# Altium PCB Flash烧录器STM32版.pcbdoc
Units mm, origin at the board's own origin, x right, y up, seen from the top; angles counter-clockwise.
Board outline 84.67 x 59.94 mm, 2 copper layers (Top Layer, Bottom Layer); 29 components, 59 nets, 142 pads, 27 vias.
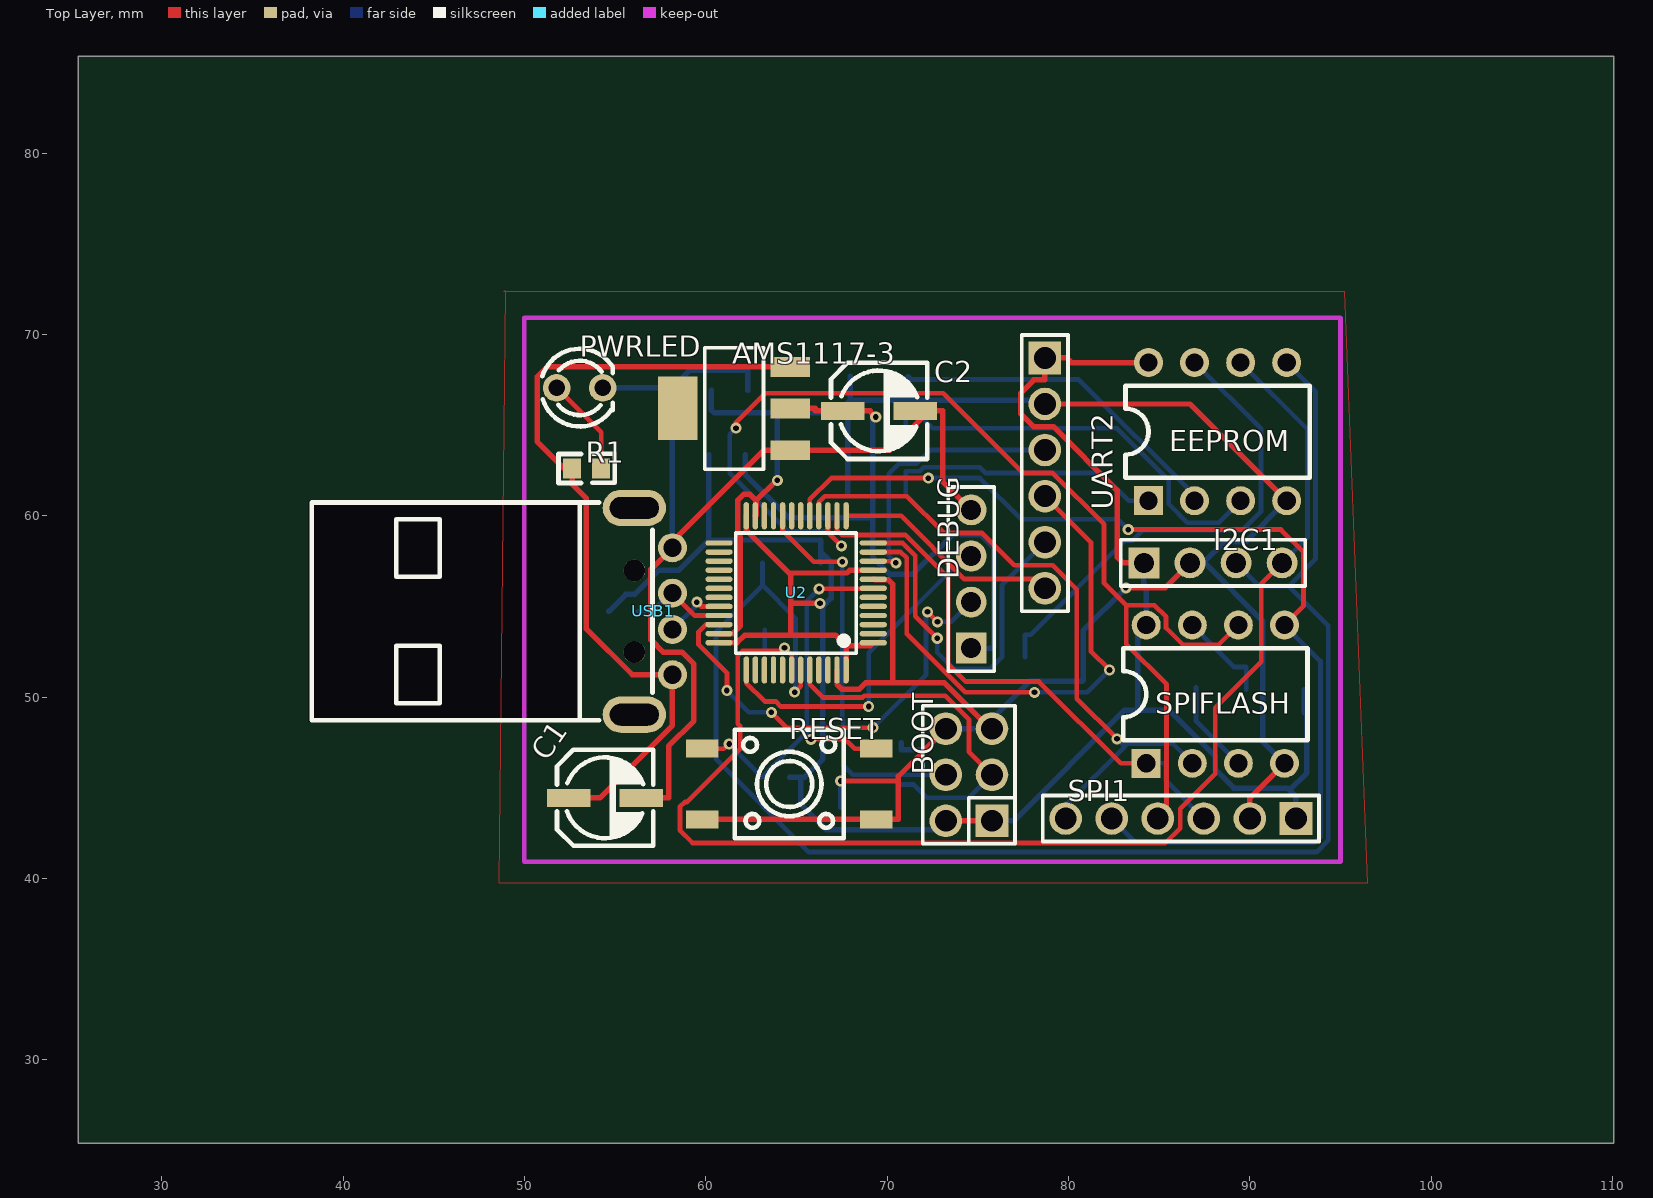
[diagram p0: Top Layer view]
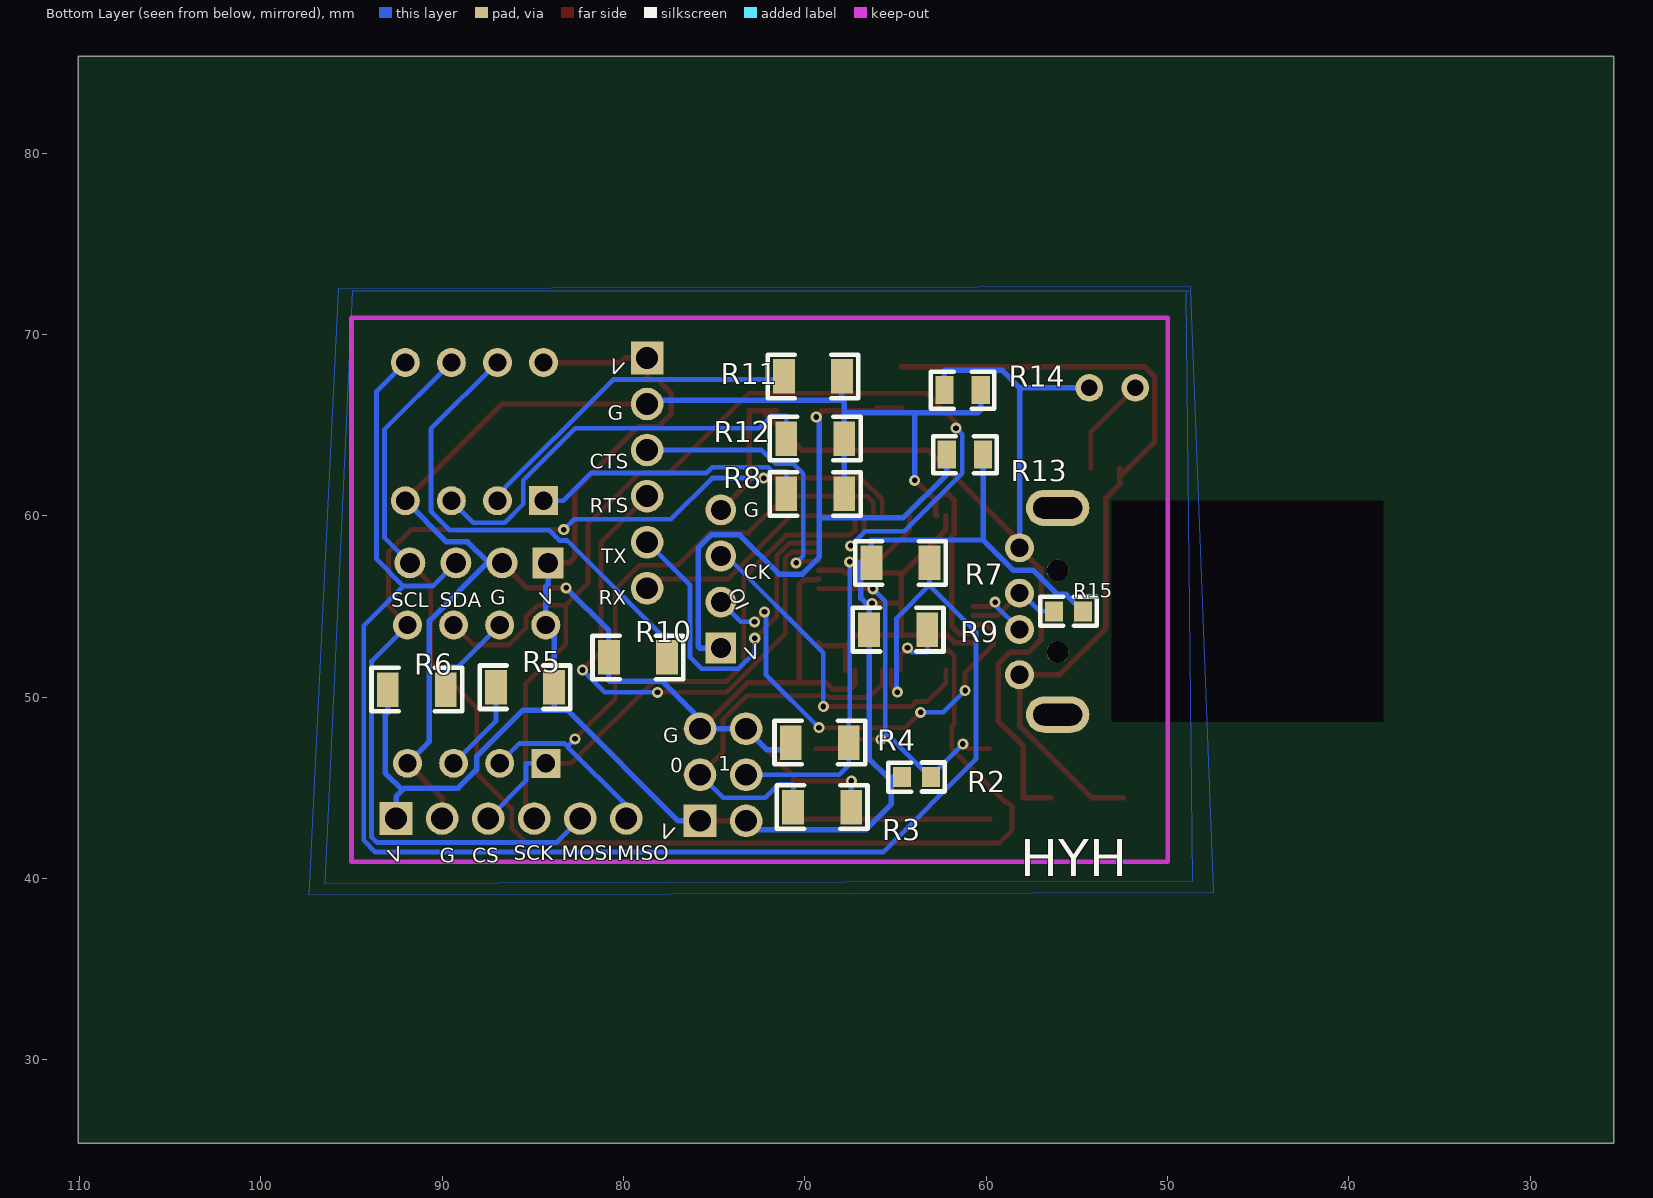
[diagram p1: Bottom Layer view, seen from below]

## Layer stack, top to bottom
Top Layer: signal copper (thickness not stored)
Dielectric: dielectric 0.32, FR-4, Dk 4.8
Bottom Layer: signal copper (thickness not stored)

## Board outline
110.075,25.4 25.4,25.4 25.4,85.344 110.075,85.344

## Components (designator, comment, footprint, x,y, rotation, side; value= is the part's Value field where it differs from the comment)
AMS1117-3 "AMS1117-3.3_C165482" SOT-223_L6.5-W3.5-P2.30-LS7.0-BR 61.561,65.913 r0 top
BOOT "210S-2*3P L=11.6MMGold-plated black" HDR-TH_6P-P2.54-V-R2-C3-S2.54 74.515,45.72 r90 top
C1 "100uF" CAP-SMD_BD5.0-L5.3-W5.3-FD 54.449,44.45 r0 top
C2 "100uF" CAP-SMD_BD5.0-L5.3-W5.3-FD 69.562,65.786 r0 top
DEBUG "MTP125-1104S1" HDR-TH_4P-P2.54-V 74.642,56.515 r90 top
EEPROM "DS1009-08AT1NX-0A2" DIP-8_L10.0-W6.5-P2.54-LS7.6-BL 88.231,64.643 r0 top
I2C1 "MTP125-1104S1" HDR-TH_4P-P2.54-V 87.977,57.404 r0 top
PWRLED "MHL3014SRTS" LED-TH_BD3.0-P2.54-FD 53.052,67.056 r0 top
R1 "1K" R0603#1 53.434,62.611 r0 top
R2 "1K" R0603#2 63.848,45.593 r0 bottom
R3 "10K" R1206 69.054,43.942 r0 bottom
R4 "10K" R1206 69.181,47.498 r0 bottom
R5 "10K" R1206 85.437,50.546 r0 bottom
R6 "10K" R1206 91.406,50.419 r0 bottom
R7 "10K" R1206 64.736,57.404 r0 bottom
R8 "10K" R1206 69.435,61.214 r0 bottom
R9 "10K" R1206 64.863,53.721 r0 bottom
R10 "10K" R1206 79.214,52.197 r0 bottom
R11 "10K" R1206 69.562,67.691 r0 bottom
R12 "10K" R1206 69.435,64.262 r0 bottom
R13 "0" R0805 61.18,63.373 r0 bottom
R14 "0" R0805 61.306,66.929 r0 bottom
R15 "1K" R0603#2 55.465,54.737 r0 bottom
RESET "K2-6639SP-C4SC-04" KEY-SMD_4P-L6.0-W6.0-P3.90-LS10.0 64.609,45.212 r0 top
SPI1 "Header-Male-2.54_1x6" HDR-TH_6P-P2.54-V 86.199,43.307 r180 top
SPIFLASH "DS1009-08AT1NX-0A2" DIP-8_L10.0-W6.5-P2.54-LS7.6-BL 88.104,50.165 r0 top
U2 "STM32F103C8T6" LQFP-48_L7.0-W7.0-P0.50-LS9.0-BL 64.99,55.753 r90 top
UART2 "Header-Male-2.54_1x6" HDR-TH_6P-P2.54-V 78.706,62.357 r270 top
USB1 "USB-05" USB-A-TH_48037-0001 57.116,54.737 r270 top

## Footprints (in the part's own frame and the unit in brackets; to place one, negate y for a bottom-side part, rotate by r counter-clockwise, add the part's x,y. Pads: shape width x height; smd on the part's side, far side on the other; paste and mask are expansions set on the pad)
CAP-SMD_BD5.0-L5.3-W5.3-FD [mm]
  rect 2.4x1 smd: 1(-2,0) 2(2,0)
  silkscreen extent -2.65,-2.65 2.65,2.65
DIP-8_L10.0-W6.5-P2.54-LS7.6-BL [mil]
  rect 63x63 hole 39.37: 1(-150,-150)
  round 63 hole 39.37: 2(-50,-150) 3(50,-150) 4(150,-150) 5(150,150) 6(50,150) 7(-50,150) 8(-150,150)
  silkscreen extent -200,-100 200,100
HDR-TH_4P-P2.54-V [mm]
  rect 1.7x1.7 hole 1.1: 1(-3.81,0)
  round 1.7 hole 1.1: 2(-1.27,0) 3(1.27,0) 4(3.81,0)
  silkscreen extent -5.08,-1.27 5.08,1.27
HDR-TH_6P-P2.54-V [mm]
  rect 1.8x1.8 hole 1.2: 1(-6.35,0)
  round 1.8 hole 1.2: 2(-3.81,0) 3(-1.27,0) 4(1.27,0) 5(3.81,0) 6(6.35,0)
  silkscreen extent -7.62,-1.27 7.62,1.27
HDR-TH_6P-P2.54-V-R2-C3-S2.54 [mm]
  rect 1.8x1.8 hole 1.2: 1(-2.54,-1.27)
  round 1.8 hole 1.2: 2(-2.54,1.27) 3(0,-1.27) 4(0,1.27) 5(2.54,-1.27) 6(2.54,1.27)
  silkscreen extent -3.81,-2.54 3.81,2.54
KEY-SMD_4P-L6.0-W6.0-P3.90-LS10.0 [mm]
  rect 1.8x1 smd: 1(-4.8,1.95) 2(4.8,1.95) 3(-4.8,-1.95) 4(4.8,-1.95)
  silkscreen extent -3,-3 3,3
LED-TH_BD3.0-P2.54-FD [mil]
  round 60 hole 36: 1(-50,0) 2(50,0)
  silkscreen extent -81,-84 72,85
LQFP-48_L7.0-W7.0-P0.50-LS9.0-BL [mm]
  oval 0.3x1.5 smd: 1(-2.75,-4.25) 2(-2.25,-4.25) 3(-1.75,-4.25) 4(-1.25,-4.25) 5(-0.75,-4.25) 6(-0.25,-4.25) 7(0.25,-4.25) 8(0.75,-4.25) 9(1.25,-4.25) 10(1.75,-4.25) 11(2.25,-4.25) 12(2.75,-4.25) 25(2.75,4.25) 26(2.25,4.25) 27(1.75,4.25) 28(1.25,4.25) 29(0.75,4.25) 30(0.25,4.25) 31(-0.25,4.25) 32(-0.75,4.25) 33(-1.25,4.25) 34(-1.75,4.25) 35(-2.25,4.25) 36(-2.75,4.25)
  oval 1.5x0.3 smd: 13(4.25,-2.75) 14(4.25,-2.25) 15(4.25,-1.75) 16(4.25,-1.25) 17(4.25,-0.75) 18(4.25,-0.25) 19(4.25,0.25) 20(4.25,0.75) 21(4.25,1.25) 22(4.25,1.75) 23(4.25,2.25) 24(4.25,2.75) 37(-4.25,2.75) 38(-4.25,2.25) 39(-4.25,1.75) 40(-4.25,1.25) 41(-4.25,0.75) 42(-4.25,0.25) 43(-4.25,-0.25) 44(-4.25,-0.75) 45(-4.25,-1.25) 46(-4.25,-1.75) 47(-4.25,-2.25) 48(-4.25,-2.75)
  silkscreen extent -3.33,-3.31 3.3,3.34
R0603#1 [mm]
  rect 1x1.1 smd: 1(-0.8,0) 2(0.8,0)
  silkscreen extent -1.55,-0.8 1.55,0.81
R0603#2 [mm]
  rect 1x1.1 smd: 1(0.8,0) 2(-0.8,0)
  silkscreen extent -1.55,-0.81 1.55,0.8
R0805 [mm]
  rect 1x1.55 smd: 1(1,0) 2(-1,0)
  silkscreen extent -1.75,-1.02 1.75,1.02
R1206 [mm]
  rect 1.2x1.9 smd: 1(1.6,0) 2(-1.6,0)
  silkscreen extent -2.5,-1.2 2.5,1.2
SOT-223_L6.5-W3.5-P2.30-LS7.0-BR [mil]
  rect 85x43 smd: 1(122,-90.5) 2(122,0.5) 3(122,90.5)
  rect 85x138 smd: 4(-122,0.5)
  silkscreen extent -64,-132 64,132
USB-A-TH_48037-0001 [mm]
  round 1.6 hole 1: 1(3.5,1.05) 2(1,1.05) 3(-1,1.05) 4(-3.5,1.05)
  oval 2x3.5 hole 1.2 slot 2.7 at 90 deg: 5(-5.7,-1.05) 6(5.7,-1.05)
  round 1.2 hole 1.2 unplated: ""(-2.25,-1.05) ""(2.25,-1.05)
  Multi-Layer board cut-out: -6.096,-4.03 6.096,-4.03 6.096,-19.016 -6.096,-19.016
  silkscreen extent -6,-18.85 6,-0.05

## Via types
v1: diameter 0.61, hole 0.31, Top Layer to Bottom Layer, 27 vias

## Nets (pads, with @x,y where several pads share a name; then routed paths per layer and width w, separated by ;. In a path a pad name is that pad's centre, name@x,y a point inside that pad or via, vN(x,y) a via of type N, cw(c..) or ccw(c..) an arc to the next point about the centre after c; other vN are vias at no path point)
+5V: AMS1117-3.3 C1.1 R1.1 USB1.1 | length 45.6
  Top Layer w0.3: C1.1@52.45,44.45 54.17,44.45 58.165,48.445 USB1.1 55.953,51.237 53.423,53.769 53.423,60.963 52.633,61.75 R1.1@52.633,62.182 ; R1.1 R1.1@52.633,62.182 ; AMS1117-3.3 51.249,68.212 50.702,67.666 50.702,64.112 R1.1@52.633,62.182
AMS1117-3_4: AMS1117-3.4
BOOT0: BOOT.3 R3.1 U2.44 | length 21.2
  Top Layer w0.26: U2.44@65.742,51.496 65.742,50.714 66.466,49.987 68.648,49.987 68.742,50.081 73.207,50.081 74.515,48.773 74.515,46.99 BOOT.3
  Bottom Layer w0.26: R3.1@70.654,43.942 70.654,45.184 71.47,45.184 72.204,44.45 74.515,44.45 BOOT.3
BOOT1: BOOT.4 R4.2 U2.20 | length 21.9
  Top Layer w0.26: U2.20@64.241,59.997 64.241,59.182 65.96,57.465 v1(67.535,57.465)
  Bottom Layer w0.26: v1(67.535,57.465) 67.535,48.786 67.581,48.74 R4.2 67.581,46.876 67.581,46.256 68.117,45.72 BOOT.4
DM: U2.32 USB1.2 | length 3.4
  Top Layer w0.26: v1(59.511,55.237) 59.747,55.001 U2.32@60.746,55.001
  Bottom Layer w0.26: USB1.2 59.511,55.082 v1(59.511,55.237)
DP: R15.1 U2.33 USB1.3 | length 5.4
  Top Layer w0.26: USB1.3 59.402,54.503 U2.33@60.746,54.503
  Bottom Layer w0.26: R15.1 57.058,54.737 58.058,55.738 USB1.3
EEPROM_A0: EEPROM.1 R8.1 | length 15.5
  Bottom Layer w0.26: R8.1@71.035,61.214 71.035,62.456 71.807,62.456 72.031,62.68 75.125,62.68 75.45,62.357 81.805,62.357 83.329,60.833 EEPROM.1
EEPROM_A1: EEPROM.2 R11.1 | length 18.8
  Bottom Layer w0.26: R11.1@71.162,67.691 71.337,67.513 80.578,67.513 86.961,61.133 EEPROM.2
EEPROM_A2: EEPROM.3 R12.1 | length 23.4
  Bottom Layer w0.26: R12.1@71.035,64.262 71.035,65.504 71.851,65.504 72.529,64.826 82.668,64.826 85.541,61.953 85.541,60.653 86.567,59.627 88.294,59.627 EEPROM.3
EEPROM_WP: EEPROM.7 R10.2 | length 26.8
  Bottom Layer w0.26: R10.2 77.614,53.439 77.919,53.439 83.123,58.644 83.547,58.644 84.109,59.205 89.585,59.205 90.624,60.241 90.624,64.79 EEPROM.7
FLASH_HOLD: R6.2 SPIFLASH.7 | length 5.2
  Bottom Layer w0.26: SPIFLASH.7 89.148,51.661 89.806,51.661 R6.2
FLASH_WP: R5.1 SPIFLASH.3 | length 5.2
  Bottom Layer w0.26: R5.1@87.037,50.546 87.037,48.692 SPIFLASH.3
GND: AMS1117-3.1 C1.2 C2.2 DEBUG.4 PWRLED.2 R14.1 USB1.4 | length 61.3
  Top Layer w0.3: C1.2@56.451,44.45 57.959,44.45 57.959,47.305 59.344,48.689 59.344,51.829 58.686,52.487 57.66,52.487 56.979,53.17 56.979,57.048 USB1.4 58.165,58.588 63.192,63.614 63.27,63.614 AMS1117-3.1 70.146,63.614 C2.2@72.318,65.786 ; C2.2@71.564,65.786 C2.2@72.318,65.786 ; DEBUG.4 73.072,61.895 73.072,65.786 C2.2@72.318,65.786
  Bottom Layer w0.3: PWRLED.2 58.165,67.056 ; USB1.4 58.165,67.056 ; R14.1@62.308,66.929 62.308,68.014 62.293,68.029 59.14,68.029 58.165,67.056
I2C_SCL: EEPROM.6 I2C1.4 R9.2 U2.42 | length 76.1
  Top Layer w0.26: v1(64.347,52.72) v1@64.347,52.545 ; U2.42@64.741,51.496 64.741,52.329 64.523,52.545 v1@64.347,52.545 ; I2C1.4 90.644,56.261 90.644,51.958 88.104,49.418 88.104,45.781 86.166,43.843 86.166,42.784 85.34,41.958 59.275,41.958 58.579,42.654 58.579,43.955 58.843,44.219 58.965,44.219 61.904,47.158 61.904,48.405 61.767,48.542 61.767,52.281 62.031,52.545 v1@64.347,52.545
  Bottom Layer w0.26: R9.2 63.263,52.479 64.106,52.479 v1(64.347,52.72) ; EEPROM.6 93.187,64.767 93.187,58.804 I2C1.4
I2C_SDA: EEPROM.5 I2C1.3 R7.2 U2.43 | length 88
  Top Layer w0.26: v1(64.901,50.274) 65.241,50.612 U2.43@65.241,51.496
  Bottom Layer w0.26: R7.2 63.136,56.162 ; v1(64.901,50.274) 64.947,50.317 64.947,54.351 63.136,56.162 ; I2C1.3 90.525,56.126 92.15,56.126 ; EEPROM.5 93.626,66.868 93.626,57.602 92.15,56.126 ; 63.136,56.162 60.573,53.597 60.573,46.579 65.688,41.46 93.684,41.46 94.327,42.103 94.327,53.95 92.15,56.126
NRST: R2.2 RESET.1 RESET.2 U2.7 | length 23.2
  Top Layer w0.26: RESET.1 61.002,47.163 61.256,47.417 v1(61.297,47.417) ; v1(65.805,47.673) 67.705,47.673 68.216,47.163 RESET.2@69.41,47.163 ; v1(66.255,55.971) 69.217,55.971 U2.7@69.247,56.002
  Bottom Layer w0.26: v1(61.297,47.417) 63.123,45.593 R2.2@63.085,45.593 ; R2.2 R2.2@63.085,45.593 ; v1(65.805,47.673) 65.485,47.993 ; v1(66.255,55.971) 65.572,55.288 65.572,48.077 65.485,47.993 ; R2.2@63.085,45.593 65.485,47.993
PWRLED_1: PWRLED.1 R1.2 | length 5.5
  Top Layer w0.26: PWRLED.1 54.233,64.605 R1.2
S$18: 
S$30: 
S$37: 
S$39: 
S$41: 
SPI_CLK: SPI1.4 SPIFLASH.6 U2.15 | length 62.4
  Top Layer w0.26: v1(61.67,64.836) 61.67,65.146 63.288,66.764 73.093,66.764 77.499,62.357 79.145,62.357 81.97,59.533 81.97,56.281 83.184,55.067 ; U2.15@66.74,59.997 66.74,59.083 v1(67.482,58.341) ; SPI1.4 85.414,43.792 85.414,50.701 83.184,52.931 83.184,55.067 ; SPIFLASH.6 88.277,52.878 86.323,52.878 85.386,53.815 85.386,54.427 84.746,55.067 83.184,55.067
  Bottom Layer w0.26: v1(61.67,64.836) 61.322,64.488 61.322,62.36 64.528,59.152 66.671,59.152 v1(67.482,58.341)
SPI_CS: SPI1.3 SPIFLASH.1 U2.14 | length 31
  Top Layer w0.26: U2.14@67.24,59.997 67.24,59.212 67.507,58.946 71.012,58.946 73.377,56.581 73.377,51.824 74.337,50.863 78.378,50.863 82.887,46.355 83.202,46.355 SPIFLASH.1
  Bottom Layer w0.26: SPIFLASH.1 85.386,46.355 85.386,45.39 SPI1.3
SPI_MISO: SPI1.6 SPIFLASH.2 U2.16 | length 36.6
  Top Layer w0.26: U2.16@66.24,59.997 66.24,60.744 66.577,61.079 71.089,61.079 73.115,59.055 75.236,59.055 77.014,57.277 79.13,57.277 80.469,55.938 80.469,49.914 v1(82.684,47.699)
  Bottom Layer w0.26: SPI1.6 79.849,44.028 83.103,47.28 ; v1(82.684,47.699) 83.103,47.28 ; SPIFLASH.2 85.742,47.447 83.268,47.447 83.103,47.28
SPI_MOSI: SPI1.5 SPIFLASH.5 U2.17 | length 59.5
  Top Layer w0.26: U2.17@65.742,59.997 65.742,60.904 66.92,62.083 v1(72.28,62.083) ; v1(83.301,59.243) 91.721,59.243 92.971,57.991 92.971,55.032 SPIFLASH.5
  Bottom Layer w0.26: v1(72.28,62.083) 75.125,62.083 77.39,59.817 82.727,59.817 v1(83.301,59.243) ; SPI1.5 83.715,41.981 93.593,41.981 93.898,42.286 93.898,51.991 SPIFLASH.5
SWDCLK: DEBUG.3 U2.37 | length 18.8
  Top Layer w0.26: U2.37@62.242,51.496 62.242,50.775 63.25,49.764 63.872,49.764 64.152,49.484 v1(68.988,49.484)
  Bottom Layer w0.26: v1(68.988,49.484) 68.988,52.446 74.327,57.785 DEBUG.3
SWDIO: DEBUG.2 U2.34 | length 24.8
  Top Layer w0.26: U2.34@60.746,54.003 60.014,54.003 59.608,53.597 59.608,52.898 61.17,51.336 v1(61.17,50.368) ; v1(63.623,49.167) 64.469,48.321 v1(69.227,48.321) ; v1(72.229,54.707) v1(72.78,54.155)
  Bottom Layer w0.26: v1(61.17,50.368) 62.371,49.167 v1(63.623,49.167) ; v1(69.227,48.321) 72.15,51.244 72.15,54.628 v1(72.229,54.707) ; v1(72.78,54.155) 73.552,54.155 DEBUG.2
U2_2: U2.2
U2_3: U2.3
U2_4: U2.4
U2_5: U2.5
U2_6: U2.6
U2_18: U2.18
U2_19: U2.19
U2_21: U2.21
U2_22: U2.22
U2_25: U2.25
U2_26: U2.26
U2_27: U2.27
U2_28: U2.28
U2_29: U2.29
U2_30: U2.30
U2_31: U2.31
U2_38: U2.38
U2_39: U2.39
U2_40: U2.40
U2_41: U2.41
U2_45: U2.45
U2_46: U2.46
UART_CTS: U2.10 UART2.3 | length 15.5
  Top Layer w0.26: U2.10@69.247,57.503 70.393,57.503 v1(70.489,57.404)
  Bottom Layer w0.26: v1(70.489,57.404) 70.1,57.793 70.1,62.319 70.669,62.888 71.64,62.888 72.381,63.627 UART2.3
UART_RTS: U2.11 UART2.4 | length 30.3
  Top Layer w0.26: U2.11@69.247,58.001 70.761,58.001 71.086,57.676 71.086,53.49 74.312,50.264 v1(78.132,50.264) ; UART2.4 81.246,58.547 81.246,52.525 v1(82.27,51.501)
  Bottom Layer w0.26: v1(78.132,50.264) 81.033,50.264 v1(82.27,51.501)
UART_RX: U2.13 UART2.6 | length 12.6
  Top Layer w0.26: U2.13@67.741,59.997 70.789,59.997 74.271,56.515 78.198,56.515 UART2.6
UART_TX: U2.12 UART2.5 | length 20
  Top Layer w0.26: U2.12@69.247,58.501 70.857,58.501 71.551,57.808 71.551,54.468 v1(72.77,53.251)
  Bottom Layer w0.26: v1(72.77,53.251) 72.77,52.464 73.672,51.562 75.699,51.562 76.339,52.202 76.339,56.18 UART2.5
USB1_5: USB1.5
USB1_6: USB1.6
VCC: AMS1117-3.2 C2.1 DEBUG.1 R13.1 | length 36.9
  Top Layer w0.3: AMS1117-3.2 66.049,65.926 66.052,65.923 66.052,65.786 67.563,65.786 69.072,65.786 69.072,65.761 v1(69.379,65.453)
  Bottom Layer w0.3: R13.1@62.181,63.373 62.181,62.288 64.568,59.898 69.204,59.898 ; v1(69.379,65.453) 69.204,65.278 69.204,59.898 ; DEBUG.1 75.803,52.705 75.897,52.799 75.897,58.229 75.173,58.953 73.601,58.953 71.437,56.787 70.144,56.787 69.204,57.729 69.204,59.898
VDD: BOOT.1 BOOT.2 EEPROM.8 I2C1.1 R2.1 R5.2 R6.1 R7.1 R9.1 R13.2 R15.2 SPI1.1 SPIFLASH.8 U2.1 U2.9 U2.24 U2.36 U2.48 UART2.1 | length 130.1
  Top Layer w0.3: U2.36@60.746,53.002 61.739,53.002 62.155,53.419 64.685,53.419 ; U2.24@62.242,59.997 62.242,59.192 64.586,56.848 64.685,56.848 ; v1(66.301,55.174) 64.685,55.174 ; U2.48@67.741,51.496 67.741,52.837 ; U2.1@69.247,53.002 69.082,52.837 67.741,52.837 ; U2.9@69.247,57.003 67.947,57.003 67.792,56.848 64.685,56.848 ; BOOT.2 BOOT.1 ; I2C1.1 83.006,57.404 82.684,57.727 82.684,61.402 79.171,64.917 78.089,64.917 77.378,65.626 77.378,66.774 78.101,67.495 78.706,67.495 UART2.1 79.283,68.707 79.918,68.707 80.172,68.453 EEPROM.8 ; 64.685,53.419 67.159,53.419 67.741,52.837 ; 64.685,53.419 64.685,55.174 ; 64.685,55.174 64.685,56.848
  Bottom Layer w0.3: R15.2 55.602,55.674 56.087,55.674 57.4,56.987 58.5,56.987 60.179,58.669 ; R13.2 60.179,58.669 ; R2.1 65.053,45.593 65.252,45.593 ; v1(66.301,55.174) v1@66.463,55.011 ; R7.1 R7.1@66.336,58.034 ; BOOT.2 72.745,42.68 66.659,42.68 65.252,44.087 65.252,45.593 ; BOOT.1 76.997,43.18 83.1,49.286 83.837,49.286 ; I2C1.1 84.167,56.243 84.294,56.116 SPIFLASH.8 83.837,53.518 R5.2 83.837,49.286 ; SPI1.1 92.549,44.402 92.549,44.516 92.198,44.869 ; R6.1@93.006,50.419 93.006,49.159 93.151,49.012 93.151,45.824 92.198,44.869 ; 60.179,58.669 66.334,58.669 66.336,58.664 R7.1@66.336,58.034 ; 65.252,45.593 65.457,45.593 66.463,46.599 R9.1 66.463,54.981 v1@66.463,55.011 ; R7.1@66.336,58.034 66.918,57.452 66.918,55.466 v1@66.463,55.011 ; 83.837,49.286 85.549,49.286 88.104,46.731 88.104,46.01 89.128,44.986 92.079,44.986 92.198,44.869
VSS: BOOT.5 BOOT.6 EEPROM.4 I2C1.2 R3.2 R4.1 R8.2 R10.1 R11.2 R12.2 R14.2 RESET.3 RESET.4 SPI1.2 SPIFLASH.4 U2.8 U2.23 U2.35 U2.47 UART2.2 | length 142.2
  Top Layer w0.3: RESET.3 69.41,43.261 70.619,43.261 70.619,45.377 ; U2.35@60.746,53.503 61.492,53.503 61.917,53.927 61.917,58.862 61.764,59.014 61.764,60.853 62.107,61.194 62.417,61.194 62.778,60.836 ; U2.23@62.742,59.997 62.778,60.033 62.778,60.112 62.778,60.836 ; v1(63.956,61.958) 63.9,61.958 62.778,60.836 ; U2.47@67.24,51.496 67.24,50.706 67.517,50.429 68.465,50.429 68.838,50.803 70.309,50.803 ; v1(67.446,45.377) 70.619,45.377 ; U2.8@69.247,56.502 69.323,56.502 69.361,56.464 70.073,56.464 70.309,56.228 70.309,50.803 ; BOOT.6 70.619,45.634 70.619,45.377 ; BOOT.5 75.691,48.26 73.148,50.803 70.309,50.803 ; UART2.2 86.707,66.167 EEPROM.4 ; v1(83.166,56.027) 85.33,56.027 I2C1.2 ; SPI1.2 90.009,44.45 SPIFLASH.4
  Bottom Layer w0.3: R14.2 60.306,65.844 60.476,65.674 63.956,65.674 ; v1(63.956,61.958) 63.956,65.674 ; v1(67.446,45.377) 67.446,45.209 67.454,45.202 R3.2 ; R8.2 R12.2 67.835,65.674 ; R11.2 67.962,66.431 67.962,66.368 ; R4.1@70.781,47.498 70.781,47.099 72.084,47.099 BOOT.6 BOOT.5 75.785,48.791 77.875,50.881 80.761,50.881 80.814,50.937 80.814,52.197 80.814,53.675 v1(83.166,56.027) ; UART2.2 78.505,66.368 67.962,66.368 ; I2C1.2 86.748,57.445 I2C1.2@87.479,57.445 ; SPIFLASH.4 90.718,47.551 90.718,54.204 I2C1.2@87.479,57.445 ; EEPROM.4 89.775,58.565 88.602,58.565 I2C1.2@87.479,57.445 ; 63.956,65.674 67.835,65.674 ; 67.835,65.674 67.835,66.241 67.962,66.368
pads on no net: USB1.

## Polygon pours and split planes (outlines as drawn)
GND on Bottom Layer (solid): 48.861,72.39 94.962,72.39 96.486,39.751 48.607,39.878 48.988,72.263
VSS on Bottom Layer (solid): 48.734,72.644 95.724,72.517 97.375,39.116 47.464,39.243 48.734,72.517
GND on Top Layer (solid): 48.607,39.751 48.988,72.39 48.861,72.39 48.988,72.39 95.216,72.39 96.486,39.751 48.607,39.751

## Silkscreen, mask and mechanical layers (free items; w line width, h text height)
Bottom Overlay:
  text "V" at 80.881,67.953 h0.8 r21
  text "G" at 80.865,65.259 h0.8
  text "CTS" at 81.881,62.592 h0.8
  text "RTS" at 81.881,60.179 h0.8
  text "G" at 73.372,59.925 h0.8
  text "TX" at 81.246,57.385 h0.8
  text "CK" at 73.372,56.496 h0.8
  text "RX" at 81.373,55.099 h0.8
  text "G" at 87.342,55.099 h0.8
  text "IO" at 73.009,55.033 h0.8 r245
  text "V" at 84.405,54.999 h0.8 r339
  text "SDA" at 90.136,54.972 h0.8
  text "SCL" at 92.803,54.972 h0.8
  text "V" at 73.102,51.951 h0.8 r339
  text "G" at 77.817,47.479 h0.8
  text "1" at 74.769,45.955 h0.8
  text "0" at 77.436,45.828 h0.8
  text "V" at 78.087,42.299 h0.8 r21
  text "MISO" at 80.357,41.002 h0.8
  text "MOSI" at 83.405,41.002 h0.8
  text "SCK" at 86.072,41.002 h0.8
  text "CS" at 88.358,40.875 h0.8
  text "G" at 90.136,40.875 h0.8
  text "V" at 92.787,40.775 h0.8 r339
  text "HYH" at 58.132,40.132 h2.03
Document:
  lines w0.003: 67.712,55.347 67.763,55.397